# EAGLE board Circuit 4 using 555 timer and 4017 (EAGLE 5.06)
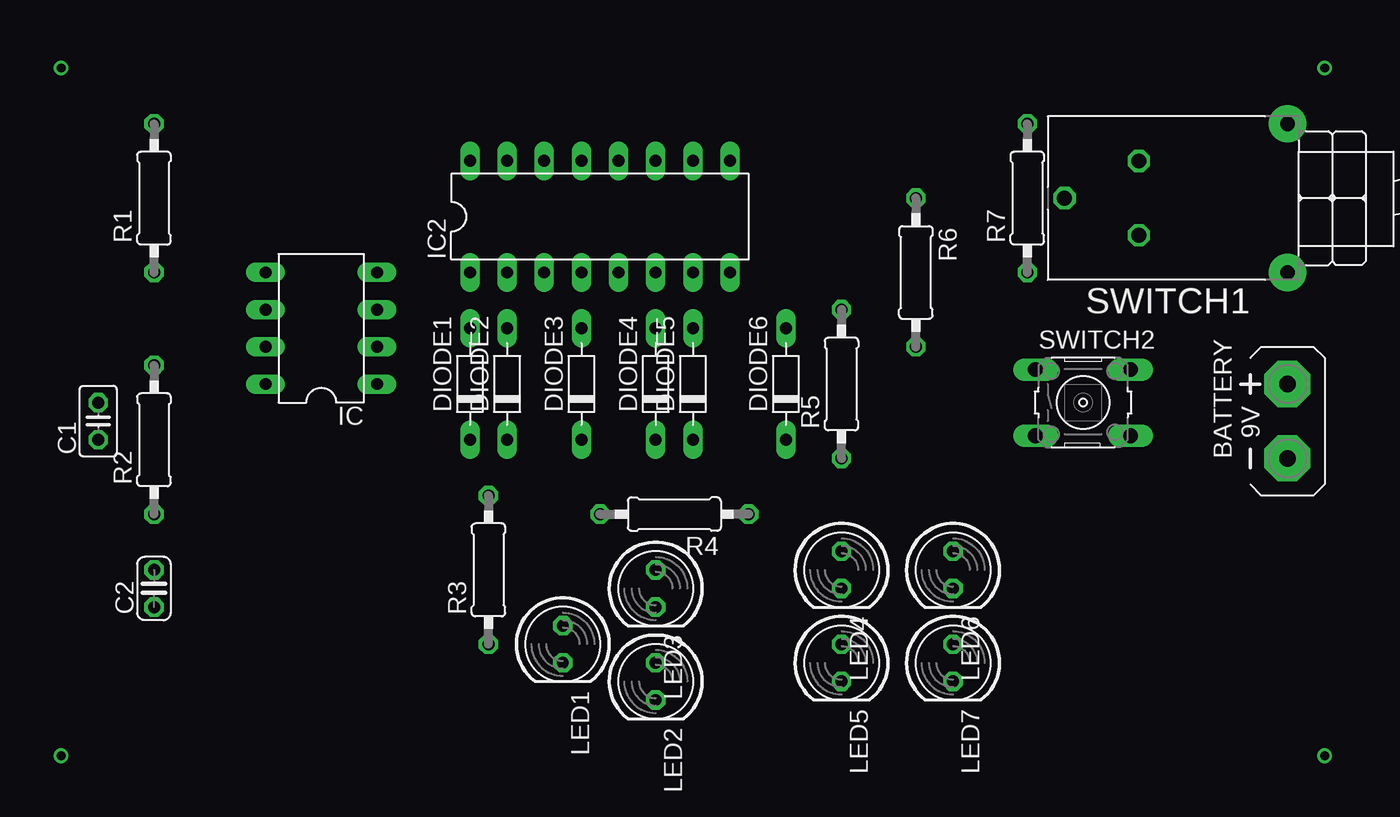
[diagram p0: board, top side]
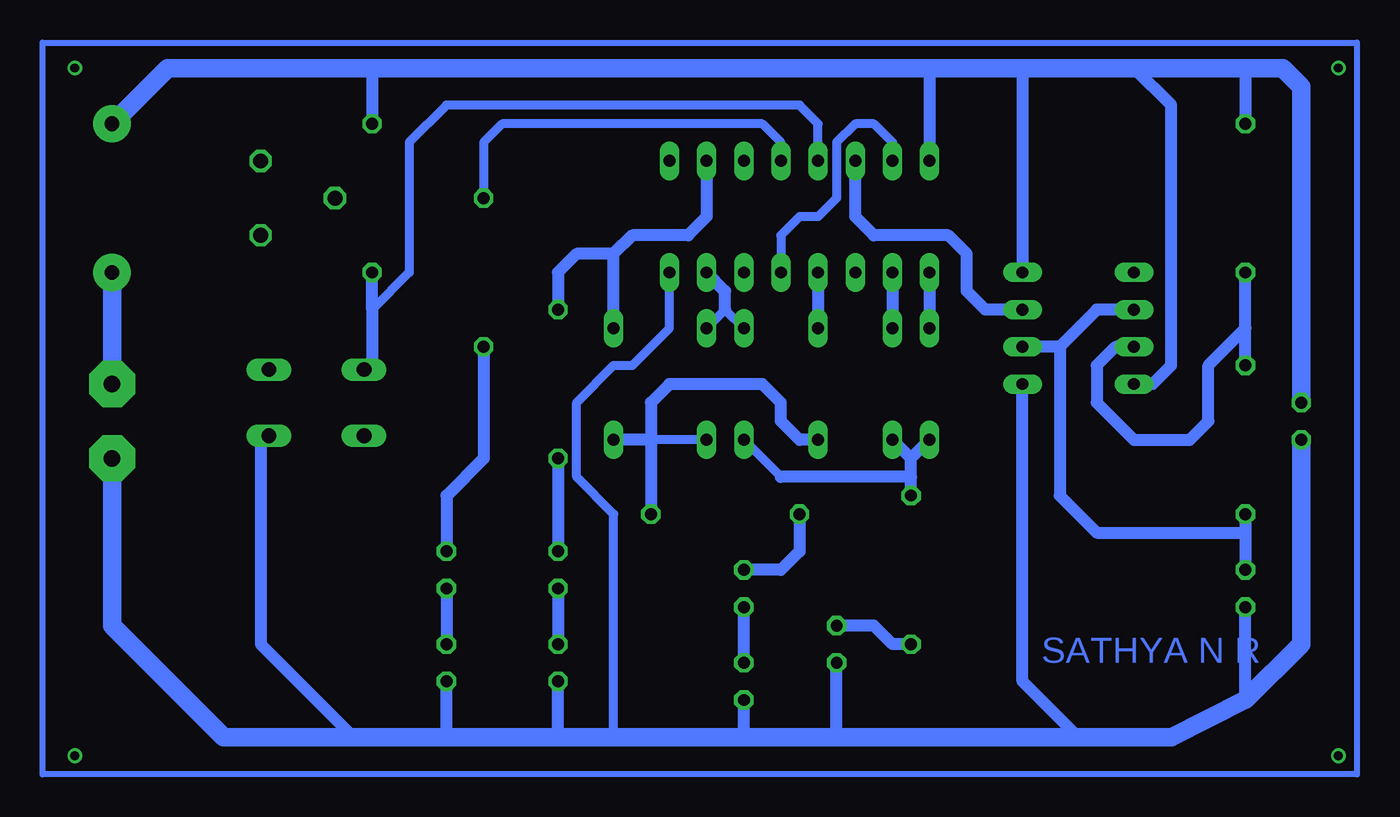
[diagram p1: board, bottom side, seen from below]

No outline drawn. Coordinates in mm, seen from the top.
Copper layers (1*16): Top 0.035mm / dielectric 1.5mm / Bottom 0.035mm
Design rules "default": minimum track width 10mil, minimum drill 24mil, track to track 8mil, track to pad 8mil, pad to pad 8mil, via to via 8mil, smd to smd 8mil, copper to edge 40mil, drill to drill 8mil, minimum pad ring 10mil, minimum via ring 8mil, stop-mask expansion 4mil, vias tented up to drill 0mil, thermal gap 10mil

## Footprints (pad centres in the part's own frame; a part is rotated, then mirrored left to right if it is on the bottom)
AB9V = drill 1.118 pad 3.15 octagon: + 0,2.54; - 0,-2.54
C025-025X050 = drill 0.813 octagon: 1 -1.27,0; 2 1.27,0
C025-024X044 = drill 0.813 octagon: 1 -1.27,0; 2 1.27,0
D-7.5 = drill 0.813 long: A 3.81,0; C -3.81,0
DIL08 = drill 0.813 long: 1 -3.81,-3.81; 2 -1.27,-3.81; 3 1.27,-3.81; 4 3.81,-3.81; 5 3.81,3.81; 6 1.27,3.81; 7 -1.27,3.81; 8 -3.81,3.81
DIL16 = drill 0.813 long: 1 -8.89,-3.81; 2 -6.35,-3.81; 3 -3.81,-3.81; 4 -1.27,-3.81; 5 1.27,-3.81; 6 3.81,-3.81; 7 6.35,-3.81; 8 8.89,-3.81; 9 8.89,3.81; 10 6.35,3.81; 11 3.81,3.81; 12 1.27,3.81; 13 -1.27,3.81; 14 -3.81,3.81; 15 -6.35,3.81; 16 -8.89,3.81
LED5MM = drill 0.813 octagon: A -1.27,0; K 1.27,0
0207/10 = drill 0.813 octagon: 1 -5.08,0; 2 5.08,0
316-917 = drill 1.016 octagon: 1 10.16,2.54; 2 15.24,0; 3 10.16,-2.54 | drill 1.016 pad 2.54 round: B 0,-5.08; B1 0,5.08
B3F-10XX = drill 1.016 long: 1 -3.251,2.261; 2 3.251,2.261; 3 -3.251,-2.261; 4 3.251,-2.261

## Placement (x,y rotation side)
BATTERY  [AB9V]  90.17,24.13 0 top
C1  0.1uF  [C025-025X050]  8.89,24.13 90 top
C2  0.01uF  [C025-024X044]  12.7,12.7 90 top
DIODE1  [D-7.5]  34.29,26.67 90 top
DIODE2  [D-7.5]  36.83,26.67 90 top
DIODE3  [D-7.5]  41.91,26.67 90 top
DIODE4  [D-7.5]  46.99,26.67 90 top
DIODE5  [D-7.5]  49.53,26.67 90 top
DIODE6  [D-7.5]  55.88,26.67 90 top
IC  555  [DIL08]  24.13,30.48 90 top
IC2  4017  [DIL16]  43.18,38.1 0 top
LED1  [LED5MM]  40.64,8.89 270 top
LED2  [LED5MM]  46.99,6.35 270 top
LED3  [LED5MM]  46.99,12.7 270 top
LED4  [LED5MM]  59.69,13.97 270 top
LED5  [LED5MM]  59.69,7.62 270 top
LED6  [LED5MM]  67.31,13.97 270 top
LED7  [LED5MM]  67.31,7.62 270 top
R1  10k  [0207/10]  12.7,39.37 90 top
R2  10k  [0207/10]  12.7,22.86 90 top
R3  470  [0207/10]  35.56,13.97 90 top
R4  330  [0207/10]  48.26,17.78 180 top
R5  330  [0207/10]  59.69,26.67 90 top
R6  330  [0207/10]  64.77,34.29 270 top
R7  10k  [0207/10]  72.39,39.37 90 top
SWITCH1  [316-917]  90.17,39.37 180 top
SWITCH2  [B3F-10XX]  76.2,25.4 0 top

## Library data of the parts
BATTERY = battery
C1 C2 R1-R7 = rcl
DIODE1-DIODE6 = diode
IC IC2 = ic-package
LED1-LED7 = led
SWITCH1 = switch
SWITCH2 = switch-omron

## Nets
S$2: IC2.14 IC.3
S$3: DIODE6.A IC2.10 R5.2
S$4: DIODE1.A IC2.1
S$5: DIODE2.A IC2.2
S$6: C2.2 IC.2 IC.6 R2.1
S$8: IC.7 R1.1 R2.2
S$9: DIODE1.C DIODE2.C DIODE4.C R3.2
S$10: DIODE4.A DIODE5.A IC2.7
S$11: DIODE3.A IC2.4
S$12: DIODE3.C DIODE5.C DIODE6.C R4.1
S$13: LED1.A R3.1
S$14: IC2.12 R6.1
S$15: LED3.A R4.2
S$16: LED3.K
S$17: LED4.A R5.1
S$18: LED4.K LED5.A
S$19: C1.2 IC2.16 IC.4 IC.8 R1.2 R7.2 SWITCH1.B
S$20: BATTERY.- C1.1 C2.1 IC2.8 IC.1 LED1.K LED5.K LED7.K
S$21: LED6.A R6.2
S$22: LED6.K LED7.A
S$25: IC2.5 IC2.15
S$26: BATTERY.+ SWITCH1.B1
S$29: IC2.13 R7.1

## Tracks (layer width: path | path; a pad name or v marks a point on that pad's centre or on a via)
S$1
  Bottom 0.406: 5.08,0 94.92,0 94.92,50 5.08,50 5.08,0
S$2
  Bottom 0.813: IC.3 30.48,31.75 31.75,33.02 31.75,35.56 33.02,36.83 38.1,36.83 39.37,38.1 IC2.14
S$3
  Bottom 0.813: IC2.10 49.53,38.1 50.8,36.83 54.61,36.83 55.88,35.56 | R5.2 59.69,34.29 58.42,35.56 55.88,35.56 | DIODE6.A 55.88,35.56
S$4
  Bottom 0.813: IC2.1 DIODE1.A
S$5
  Bottom 0.813: IC2.2 DIODE2.A
S$6
  Bottom 0.813: IC.6 22.86,31.75 25.4,29.21 | 25.4,29.21 IC.2 | 25.4,29.21 25.4,19.05 22.86,16.51 12.7,16.51 | R2.1 12.7,16.51 | 12.7,16.51 C2.2
S$8
  Bottom 0.813: IC.7 21.59,29.21 22.86,27.94 22.86,25.4 20.32,22.86 16.51,22.86 15.24,24.13 15.24,27.94 12.7,30.48 | R2.2 12.7,30.48 | 12.7,30.48 R1.1
S$9
  Bottom 0.61: DIODE4.C 44.45,20.32
  Bottom 0.813: 35.56,21.59 DIODE1.C | 35.56,21.59 DIODE2.C | 35.56,20.32 35.56,21.59 | 35.56,20.32 44.45,20.32 | R3.2 35.56,20.32
S$10
  Bottom 0.61: DIODE4.A 48.26,31.75 DIODE5.A
  Bottom 0.813: IC2.7 48.26,33.02 48.26,31.75
S$11
  Bottom 0.813: IC2.4 DIODE3.A
S$12
  Bottom 0.61: DIODE5.C 53.34,22.86
  Bottom 0.813: 53.34,22.86 DIODE6.C | 53.34,22.86 R4.1 | 53.34,22.86 53.34,25.4 52.07,26.67 45.72,26.67 44.45,25.4 44.45,24.13 43.18,22.86 DIODE3.C
S$13
  Bottom 0.813: R3.1 36.83,8.89 38.1,10.16 LED1.A
S$14
  Bottom 0.61: IC2.12 44.45,43.18 45.72,44.45 63.5,44.45 64.77,43.18 R6.1
S$15
  Bottom 0.813: R4.2 43.18,15.24 44.45,13.97 LED3.A
S$16
  Bottom 0.813: 46.99,7.62 LED3.K
S$17
  Bottom 0.813: R5.1 LED4.A
S$18
  Bottom 0.813: LED4.K LED5.A
S$19
  Bottom 0.813: 72.39,48.26 R7.2 | 34.29,48.26 IC2.16 | 27.94,48.26 IC.4 | 12.7,48.26 R1.2 | 20.32,48.26 17.78,45.72 17.78,27.94 19.05,26.67 IC.8
  Bottom 1.27: C1.2 8.89,46.99 10.16,48.26 12.7,48.26 20.32,48.26 27.94,48.26 34.29,48.26 72.39,48.26 86.36,48.26 SWITCH1.B
S$20
  Bottom 0.61: IC2.8 52.07,30.48 54.61,27.94 55.88,27.94 58.42,25.4 58.42,20.32 55.88,17.78 55.88,2.54
  Bottom 0.813: 73.66,2.54 80.01,8.89 80.01,22.86 | 67.31,2.54 LED7.K | 59.69,2.54 LED5.K | 46.99,2.54 46.99,5.08 | IC.1 27.94,6.35 24.13,2.54 | 40.64,2.54 LED1.K | 12.7,5.08 C2.1
  Bottom 1.27: BATTERY.- 90.17,10.16 82.55,2.54 73.66,2.54 67.31,2.54 59.69,2.54 55.88,2.54 46.99,2.54 40.64,2.54 24.13,2.54 17.78,2.54 12.7,5.08 8.89,8.89 C1.1
S$21
  Bottom 0.813: R6.2 64.77,21.59 67.31,19.05 LED6.A
S$22
  Bottom 0.813: LED6.K LED7.A
S$23  (via drill 0.6)
  other vias: 6.35,48.26
S$24  (via drill 0.6)
  other vias: 6.35,1.27
S$25
  Bottom 0.61: IC2.15 36.83,43.18 38.1,44.45 39.37,44.45 40.64,43.18 40.64,39.37 41.91,38.1 43.18,38.1 44.45,36.83 IC2.5
S$26
  Bottom 1.27: SWITCH1.B1 BATTERY.+
S$27  (via drill 0.6)
  other vias: 92.71,1.27
S$28  (via drill 0.6)
  other vias: 92.71,48.26
S$29
  Bottom 0.61: 72.39,31.75 69.85,34.29 69.85,43.18 67.31,45.72 43.18,45.72 41.91,44.45 IC2.13
  Bottom 0.813: R7.1 72.39,31.75 72.39,27.94

## Text on the board
Bottom: SATHYA N R